# Altium PCB DiPho_devboard.PcbDoc
Units mm, origin at the board's own origin, x right, y up, seen from the top; angles counter-clockwise.
Board outline 100 x 30 mm, 2 copper layers (Top Layer, Bottom Layer); 13 components, 12 nets, 53 pads, 213 vias.
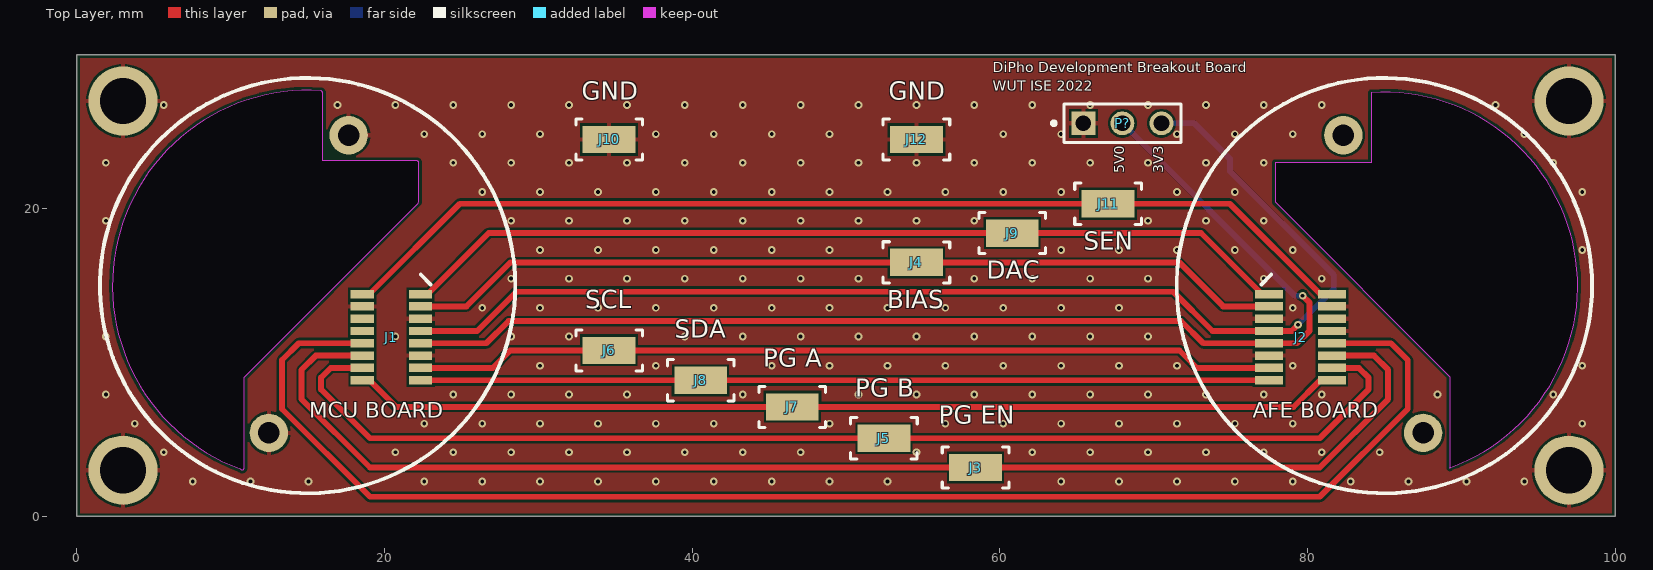
[diagram p0: Top Layer view]
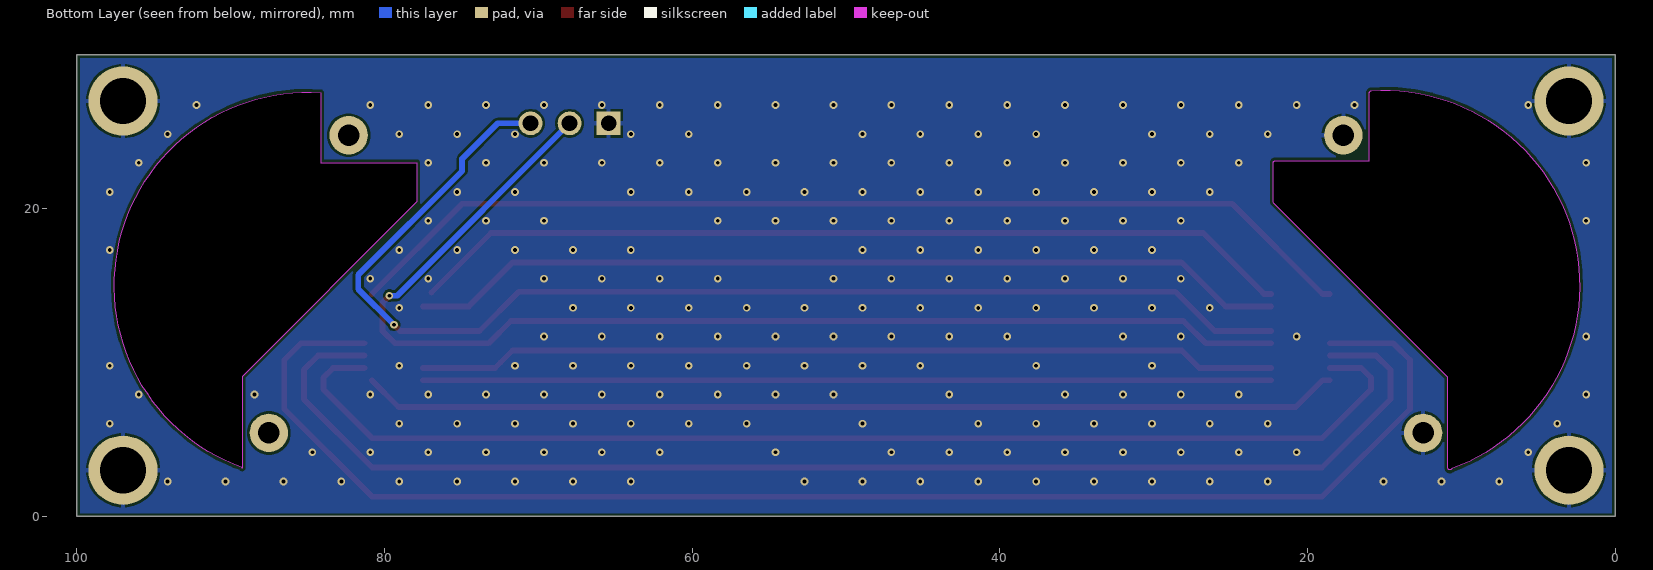
[diagram p1: Bottom Layer view, seen from below]
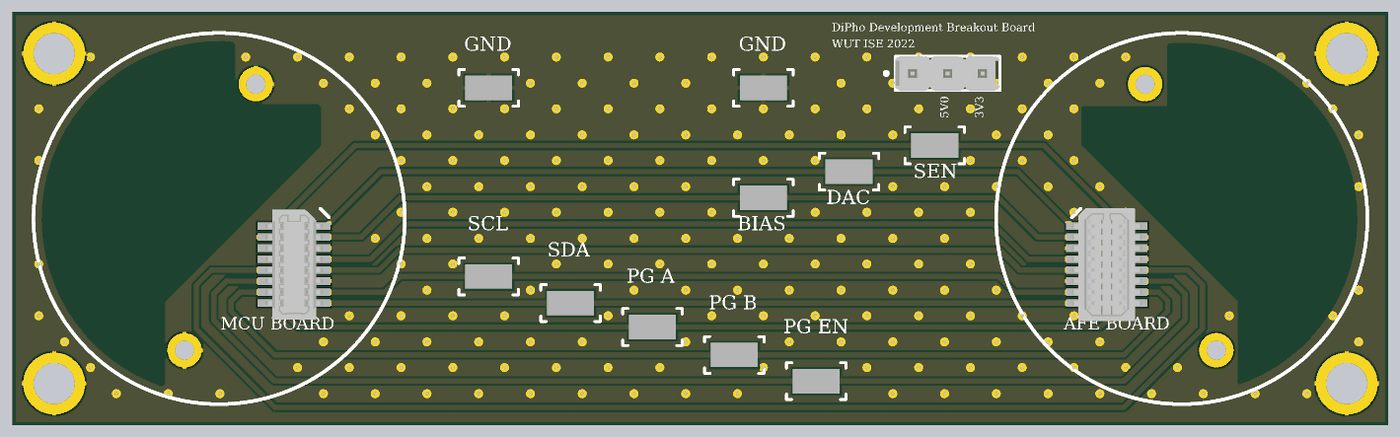
[diagram p2: 3D render of the assembled board from above, using the file's embedded part models]

## Layer stack, top to bottom
Top Solder: solder mask 0.0102, Solder Resist, Dk 3.5
Top Layer: signal copper 0.0356
Dielectric 1: dielectric 0.32, FR-4, Dk 4.8
Bottom Layer: signal copper 0.0356
Bottom Solder: solder mask 0.0102, Solder Resist, Dk 3.5

## Board outline
0,0 0,30 100,30 100,0
cut-out: 10.629,3.082 ccw(c10.742,3.141) 10.866,3.114 10.869,3.225 10.869,9.038 22.188,20.357 22.225,20.447 22.225,22.987 ccw(c22.098,22.987) 22.098,23.114 15.974,23.114 15.974,27.538 ccw(c15.846,27.538) 15.855,27.665 ccw(c15,15)
cut-out: 77.902,20.447 89.258,9.091 89.258,3.141 89.247,3.173 ccw(c85,15) 84.154,27.538 84.154,22.987 77.902,22.987

## Design rules (kind name [scope] priority, off if disabled: settings)
BoardOutlineClearance [All] p1: gap=0.2 ignorepadtopadclearanceinfootprint=FALSE
Clearance [All] p1: gap=0.152 ignorepadtopadclearanceinfootprint=FALSE except(0.25: Arc-Hole Track-Hole SMDPad-Hole THPad-Hole Via-Hole Fill-Hole Poly-Hole Region-Hole Text-Hole)
ComponentClearance [All] p1: gap=0.102 collisioncheckmode=3 verticalgap=0.102 showdistances=TRUE
DiffPairsRouting [All] p1: maxlimit=0.102 minlimit=0.102 mostfreqgap=0.102 toplayer_minwidth=0.102 toplayer_maxwidth=1816.048 toplayer_prefwidth=0.102 bottomlayer_minwidth=0.102 bottomlayer_maxwidth=1816.048 bottomlayer_prefwidth=0.102 maxuncoupledlength=12.7
Height [All] p1: minheight=0 maxheight=1816.048 prefheight=12.7
HoleSize [All] p1: absolutevalues=TRUE maxlimit=6.3 minlimit=0.2 maxpercent=80.000 minpercent=20.000
HoleToHoleClearance [All] p1: gap=0.25 allowstackedmicrovias=FALSE
MinimumAnnularRing [All] p1: minimumring=0.076
MinimumSolderMaskSliver [All] p1: minsoldermaskwidth=0
PlaneClearance [All] p1: clearance=0.102
PlaneConnect PlaneConnectPowerPads [InPadClass('PowerPads')] p1: planeconnectstyle=Direct reliefexpansion=0.508 reliefentries=4 reliefconductorwidth=0.254 reliefairgap=0.254
PlaneConnect [All] p2: pad.planeconnectstyle=Relief pad.reliefexpansion=0.3 pad.reliefentries=4 pad.reliefconductorwidth=0.102 pad.reliefairgap=0.102 via.planeconnectstyle=Direct via.reliefexpansion=0.3 via.reliefentries=4 via.reliefconductorwidth=0.127 via.reliefairgap=0.127
PolygonConnect PolygonConnectPowerPads [All vs (InPadClass('PowerPads'))] p1: connectstyle=Direct reliefconductorwidth=0.254 reliefentries=4 polygonreliefangle="90 Angle" airgapwidth=0.254
PolygonConnect [All] p2: thpad.connectstyle=Relief thpad.reliefconductorwidth=0.3 thpad.reliefentries=4 thpad.polygonreliefangle="90 Angle" thpad.airgapwidth=0.152 smdpad.connectstyle=Relief smdpad.reliefconductorwidth=0.3 smdpad.reliefentries=4 smdpad.polygonreliefangle="90 Angle" smdpad.airgapwidth=0.152 via.connectstyle=Direct via.reliefconductorwidth=0.127 via.reliefentries=4 via.polygonreliefangle="90 Angle" via.airgapwidth=0.127
RoutingVias [All] p1: holewidth=0.2 width=0.45 viastyle="Through Hole" minholewidth=0.2 minwidth=0.45 maxholewidth=6.3 maxwidth=6.55
SilkToSilkClearance [All] p1: silktosilkclearance=0
SilkToSolderMaskClearance [IsPad] p1: minsilkscreentomaskgap=0.102 clearancetoexposedcopper=TRUE
SolderMaskExpansion [All] p1: expansion=0.075 istentingtop=FALSE
Width [All] p1: maxlimit=1816.048 minlimit=0.102 preferedwidth=0.102
20 further rules are at their usual default settings.

## Components (designator, comment, footprint, x,y, rotation, side; value= is the part's Value field where it differs from the comment)
J1 "52465-1671" 524651671 20.45,11.65 r0 top locked
J2 "53307-1671" 533071671 79.55,11.65 r0 top locked
J3 "5015" FP-5015-MFG 58.42,3.175 r0 top
J4 "5015" FP-5015-MFG 54.578,16.51 r0 top
J5 "5015" FP-5015-MFG 52.464,5.08 r0 top
J6 "5015" FP-5015-MFG 34.599,10.785 r0 top
J7 "5015" FP-5015-MFG 46.509,7.112 r0 top
J8 "5015" FP-5015-MFG 40.554,8.85 r0 top
J9 "5015" FP-5015-MFG 60.807,18.415 r0 top
J10 "5015" FP-5015-MFG 34.599,24.5 r0 top
J11 "5015" FP-5015-MFG 67.035,20.32 r0 top
J12 "5015" FP-5015-MFG 54.578,24.5 r0 top
P? "22-28-4033" MOLX-22-28-4033_V 67.969,25.554 r0 top

## Footprints (in the part's own frame and the unit in brackets; to place one, negate y for a bottom-side part, rotate by r counter-clockwise, add the part's x,y. Pads: shape width x height; smd on the part's side, far side on the other; paste and mask are expansions set on the pad)
524651671 [mm] "Molex Slim Stack, 0.80mm pitch, 20ckt"
  rect 1.5x0.55 smd: 1(-1.9,2.8) 2(-1.9,2) 3(-1.9,1.2) 4(-1.9,0.4) 5(-1.9,-0.4) 6(-1.9,-1.2) 7(-1.9,-2) 8(-1.9,-2.8) 9(1.9,-2.8) 10(1.9,-2) 11(1.9,-1.2) 12(1.9,-0.4) 13(1.9,0.4) 14(1.9,1.2) 15(1.9,2) 16(1.9,2.8)
  silkscreen extent 1.91,3.43 2.54,4.06, body extent -2.1,-4 2.1,4, height 3.56
533071671 [mm] "Molex Slim Stack, 0.80mm pitch, 20ckt"
  rect 1.8x0.55 smd: 1(2.05,2.8) 2(2.05,2) 3(2.05,1.2) 4(2.05,0.4) 5(2.05,-0.4) 6(2.05,-1.2) 7(2.05,-2) 8(2.05,-2.8) 9(-2.05,-2.8) 10(-2.05,-2) 11(-2.05,-1.2) 12(-2.05,-0.4) 13(-2.05,0.4) 14(-2.05,1.2) 15(-2.05,2) 16(-2.05,2.8)
  silkscreen extent -2.54,3.43 -1.91,4.06, body extent -2.55,-4.1 2.55,4.1, height 3.67
FP-5015-MFG [mm]
  rect 3.43x1.78 smd paste+0 mask+0: 1(0,0)
  silkscreen extent -2.16,-1.34 2.17,1.34
MOLX-22-28-4033_V [mm] "THD, 3-Leads, Body 7.62x2.49mm, Pitch 2.54mm"
  rect 1.55x1.55 hole 1.02: 1(-2.54,0)
  round 1.55 hole 1.02: 2(0,0) 3(2.54,0)
  silkscreen extent -4.58,-1.24 3.81,1.24, body extent -3.81,-1.24 3.81,1.24, height 8.38

## Part data
J1: "A Connector for Board - Board Connections with A 0.80 mm Pitch. (Molex)", Manufacturer=Molex, Supplier Part Number 1=3500606, Category="Headers and Wire Housings", ComponentLink1Description=https://datasheet.ciiva.com/5130/0524651671-pcb-receptacles-170554-5130522.pdf?src-supplier=Mouser, ComponentLink1URL=https://datasheet.ciiva.com/5130/0524651671-pcb-receptacles-170554-5130522.pdf?src-supplier=Mouser, ComponentLink2Description=https://datasheet.ciiva.com/10078/0524651671-pcb-receptacles-10078959.pdf?src-supplier=Avnet, ComponentLink2URL=https://datasheet.ciiva.com/10078/0524651671-pcb-receptacles-10078959.pdf?src-supplier=Avnet, Manufacturer Part Number=52465-1671, RoHS=Yes, Stock 1=1320, Supplier 1=Farnell
J2: "0.80mm Pitch Header Surface Mount Dual Row Vertical Stacking 4.50 and 5.50mm Stacking Heights 16 Circuits", Manufacturer=Molex, Supplier Part Number 1=3499278, Category="Headers and Wire Housings", ComponentLink1Description=https://datasheet.ciiva.com/5130/0533071671-pcb-headers-170920-5130475.pdf?src-supplier=Mouser, ComponentLink1URL=https://datasheet.ciiva.com/5130/0533071671-pcb-headers-170920-5130475.pdf?src-supplier=Mouser, ComponentLink2Description=https://datasheet.ciiva.com/1440/1875052-1440388.pdf?src-supplier=Element14, ComponentLink2URL=https://datasheet.ciiva.com/1440/1875052-1440388.pdf?src-supplier=Element14, ComponentLink3Description=https://datasheet.ciiva.com/10079/0533071671-pcb-headers-10079144.pdf?src-supplier=Avnet, ComponentLink3URL=https://datasheet.ciiva.com/10079/0533071671-pcb-headers-10079144.pdf?src-supplier=Avnet, Manufacturer Part Number=53307-1671, RoHS=Yes, Stock 1=7000, Supplier 1=Farnell
J3 J4 J5 J6 J7 J8 J9 J10 J11 J12: library part CMP-2000-05183-2, "PC TEST POINT MINIATURE", Manufacturer=keystone, Automotive=No, Category=Conn, ComponentLink2Description=Datasheet, ComponentLink2URL=http://www.keyelco.com/product-pdf.cfm?p=1353, Conn Orientation=Straight, Contact Material=Silver, Device Class L1=Connectors, Device Class L2=unset, Device Class L3=unset, Digikey Description="PC TEST POINT MINIATURE", Height=1.65mm, Lead Free=Yes, Manufacturer Part Number=5015, Number Of Contacts=1, Octopart=https://octopart.com/5015-keystone-3822, Package=5015, RoHS=TRUE
P?: library part CMP-1676-00001-5, "Male Header, Pitch 2.54 mm, 1 x 3 Position, Height 8.38 mm, Tail Length 3.18 mm, RoHS, Bulk", Colour=Black, Current Rating="4 A", Manufacturer=Molex, Max Operating Temperature="75 degC", Min Operating Temperature="0 degC", Package Quantity=1, Voltage Rating="250 V", ComponentLink1Description="Manufacturer URL", ComponentLink1URL=http://www.molex.com/, ComponentLink2Description=Datasheet, ComponentLink2URL=http://www.molex.com/pdm_docs/sd/022284033_sd.pdf, Contact Finish=Gold, Contact Material=Brass, Contact Plating=Gold, DatasheetVersion="Rev. G, 01/2012", Height="8.38 mm", Lead Pitch="0.1 inch", Length="7.62 mm", Mount="Through Hole", Mounting Technology="Through Hole", PackageDescription="Male Header, Pitch 2.54 mm, 1 x 3 Position, Height 8.38 mm, Tail Length 3.18 mm", PackageReference=22-28-4033, Packaging=Bulk, Pins=3, REACH SVHC=Unknown, RoHSCompliant=true, Rows=1

## Free pads (board coordinates)
  round 4.5 hole 3: MH(3,3) MH(3,27) MH(97,3) MH(97,27)
  round 2.5 hole 1.4: MH(12.484,5.423) MH(17.665,24.777) MH(82.335,24.777) MH(87.516,5.423)

## Via types
v1: diameter 0.5, hole 0.25, Top Layer to Bottom Layer, 213 vias

## Nets (pads, with @x,y where several pads share a name; then routed paths per layer and width w, separated by ;. In a path a pad name is that pad's centre, name@x,y a point inside that pad or via, vN(x,y) a via of type N, cw(c..) or ccw(c..) an arc to the next point about the centre after c; other vN are vias at no path point)
AFE_TYPE_IND: J1.5 J2.5 | length 95.6
  Top Layer w0.381: J1.5 14.425,11.25 13.335,10.16 13.335,6.985 19.05,1.27 80.8,1.27 86.515,6.985 86.515,10.16 85.425,11.25 J2.5 J2.5@81.3,11.25
DAC0_OUT: J1.16 J2.16 J9.1 | length 57.8
  Top Layer w0.381: J1.16 22.825,14.45 22.91,14.534 22.91,14.547 26.777,18.415 73.073,18.415 J2.16@76.94,14.547
GND: J1.2 J1.11 J1.14 J2.2 J2.3 J2.4 J2.11 J2.14 J10.1 J12.1 P?.1 pad.MH@3,3 pad.MH@3,27 pad.MH@12.484,5.423 pad.MH@17.665,24.777 pad.MH@97,3 pad.MH@97,27
  other v1: 7.528,2.264 11.292,2.264 15.056,2.264 22.584,2.264 26.348,2.264 30.112,2.264 33.876,2.264 37.64,2.264 41.404,2.264 45.168,2.264 48.932,2.264 52.696,2.264 63.988,2.264 67.752,2.264 71.516,2.264 75.28,2.264 79.044,2.264 82.808,2.264 86.572,2.264 90.336,2.264 94.1,2.264 5.646,4.164 20.702,4.164 24.466,4.164 28.23,4.164 31.994,4.164 35.758,4.164 39.522,4.164 43.286,4.164 47.05,4.164 54.578,4.164 62.106,4.164 65.87,4.164 69.634,4.164 73.398,4.164 77.162,4.164 80.926,4.164 84.69,4.164 3.764,6.028 22.584,6.028 26.348,6.028 30.112,6.028 33.876,6.028 37.64,6.028 41.404,6.028 48.932,6.028 56.46,6.028 60.224,6.028 63.988,6.028 67.752,6.028 71.516,6.028 75.28,6.028 79.044,6.028 97.864,6.028 1.882,7.928 24.466,7.928 28.23,7.928 31.994,7.928 35.758,7.928 43.286,7.928 50.814,7.928 54.578,7.928 58.342,7.928 62.106,7.928 65.87,7.928 69.634,7.928 73.398,7.928 77.162,7.928 80.926,7.928 88.454,7.928 95.982,7.928 30.112,9.792 37.64,9.792 45.168,9.792 48.932,9.792 52.696,9.792 56.46,9.792 60.224,9.792 63.988,9.792 67.752,9.792 71.516,9.792 79.044,9.792 97.864,9.792 1.882,11.692 20.702,11.692 28.23,11.692 31.994,11.692 39.522,11.692 43.286,11.692 47.05,11.692 50.814,11.692 54.578,11.692 58.342,11.692 62.106,11.692 65.87,11.692 69.634,11.692 26.348,13.556 30.112,13.556 33.876,13.556 37.64,13.556 41.404,13.556 45.168,13.556 48.932,13.556 52.696,13.556 56.46,13.556 60.224,13.556 63.988,13.556 67.752,13.556 79.044,13.556 28.23,15.456 31.994,15.456 35.758,15.456 39.522,15.456 43.286,15.456 47.05,15.456 50.814,15.456 58.342,15.456 62.106,15.456 65.87,15.456 69.634,15.456 77.162,15.456 80.926,15.456 30.112,17.32 33.876,17.32 37.64,17.32 41.404,17.32 45.168,17.32 48.932,17.32 63.988,17.32 67.752,17.32 71.516,17.32 75.28,17.32 79.044,17.32 97.864,17.32 1.882,19.22 28.23,19.22 31.994,19.22 35.758,19.22 39.522,19.22 43.286,19.22 47.05,19.22 50.814,19.22 54.578,19.22 58.342,19.22 69.634,19.22 73.398,19.22 77.162,19.22 26.348,21.084 30.112,21.084 33.876,21.084 37.64,21.084 41.404,21.084 45.168,21.084 48.932,21.084 52.696,21.084 56.46,21.084 60.224,21.084 63.988,21.084 71.516,21.084 75.28,21.084 97.864,21.084 1.882,22.984 24.466,22.984 28.23,22.984 31.994,22.984 35.758,22.984 39.522,22.984 43.286,22.984 47.05,22.984 50.814,22.984 54.578,22.984 58.342,22.984 62.106,22.984 65.87,22.984 69.634,22.984 73.398,22.984 77.162,22.984 95.982,22.984 22.584,24.848 26.348,24.848 30.112,24.848 37.64,24.848 41.404,24.848 45.168,24.848 48.932,24.848 60.224,24.848 63.988,24.848 71.516,24.848 75.28,24.848 79.044,24.848 94.1,24.848 5.646,26.748 16.938,26.748 20.702,26.748 24.466,26.748 28.23,26.748 31.994,26.748 35.758,26.748 39.522,26.748 43.286,26.748 47.05,26.748 50.814,26.748 54.578,26.748 58.342,26.748 62.106,26.748 65.87,26.748 69.634,26.748 73.398,26.748 77.162,26.748 80.926,26.748 92.218,26.748
P3V3: J1.12 J2.12 P?.2 | length 78.9
  Top Layer w0.381: J1.12 26.617,11.25 28.067,12.7 71.783,12.7 73.233,11.25 J2.12 79.322,11.25 80.14,12.068 80.14,13.889 v1(79.683,14.346)
  Bottom Layer w0.381: P?.2@67.811,26.094 68.098,25.807 68.222,25.807 P?.2@68.222,25.617 ; P?.2 79.177,14.346 v1(79.683,14.346)
P5V0: J1.13 J2.13 P?.3 | length 79.3
  Top Layer w0.381: J1.13 26.02,12.05 28.575,14.605 71.275,14.605 73.83,12.05 J2.13 78.985,12.05 v1(79.387,12.453)
  Bottom Layer w0.381: P?.3 72.647,25.554 74.955,23.246 74.955,22.453 81.708,15.701 81.708,14.773 v1(79.387,12.453)
PD_BIAS: J1.15 J2.15 J4.1 | length 57.5
  Top Layer w0.381: J1.15 25.334,13.65 28.194,16.51 71.656,16.51 74.516,13.65 J2.15
SCL: J1.10 J2.10 J6.1 | length 56.1
  Top Layer w0.381: J1.10 27.038,9.65 28.173,10.785 71.677,10.785 72.459,10.003 72.812,9.65 J2.10
SDA: J1.9 J2.9 J8.1 | length 55.1
  Top Layer w0.381: J1.9 J2.9
SEN_SIGNAL: J1.1 J2.1 J11.1 | length 67.1
  Top Layer w0.381: J1.1 19.025,14.45 24.895,20.32 74.955,20.32 J2.1@80.825,14.45
TIA_GAIN_SEL_A: J1.8 J2.8 J7.1 | length 63.7
  Top Layer w0.381: J1.8 19.025,8.85 20.763,7.112 79.087,7.112 J2.8@80.825,8.85
TIA_GAIN_SEL_B: J1.7 J2.7 J5.1 | length 78.1
  Top Layer w0.381: J1.7 16.508,9.65 15.875,9.017 15.875,8.255 19.05,5.08 54.148,5.08 80.8,5.08 83.975,8.255 83.975,9.017 83.342,9.65 J2.7 J2.7@81.3,9.65
TIA_GAIN_SEL_EN: J1.6 J2.6 J3.1 | length 86.8
  Top Layer w0.381: J1.6 15.53,10.45 14.605,9.525 14.605,7.62 19.05,3.175 50.955,3.175 60.533,3.175 80.8,3.175 85.245,7.62 85.245,9.525 84.32,10.45 J2.6 J2.6@81.3,10.45
pads on no net: J1.3 J1.4

## Polygon pours and split planes (outlines as drawn)
GND on Top Layer "GND" (solid, pour order 1): 0,29.972 0,0 100.33,0 99.949,0.381 99.949,29.972
GND on Bottom Layer "GND" (solid, pour order 0): 0,29.972 0,0 100.33,0 99.949,0.381 99.949,29.972

## Silkscreen, mask and mechanical layers (free items; w line width, h text height)
Top Overlay:
  circle w0.254: c85,15 r13.5
  circle w0.254: c15,15 r13.5
  text "DiPho Development Breakout Board" at 59.555,28.63 h1.15
  text "WUT ISE 2022" at 59.555,27.438 h1.15
  text "GND" at 32.809,26.709 h2
  text "GND" at 52.788,26.709 h2
  text "5V0" at 68.312,22.303 h1.15 r90
  text "3V3" at 70.852,22.303 h1.15 r90
  text "SEN" at 65.472,16.949 h2
  text "DAC" at 59.151,15.044 h2
  text "SCL" at 33.059,13.139 h2
  text "BIAS" at 52.674,13.139 h2
  text "SDA" at 38.862,11.234 h2
  text "PG A" at 44.617,9.32 h2
  text "PG B" at 50.592,7.384 h2
  text "MCU BOARD" at 15.105,6.055 h1.75
  text "AFE BOARD" at 76.43,6.055 h1.75
  text "PG EN" at 56.023,5.646 h2